# EAGLE board Girraffe V3.3 (EAGLE 7.7.0)
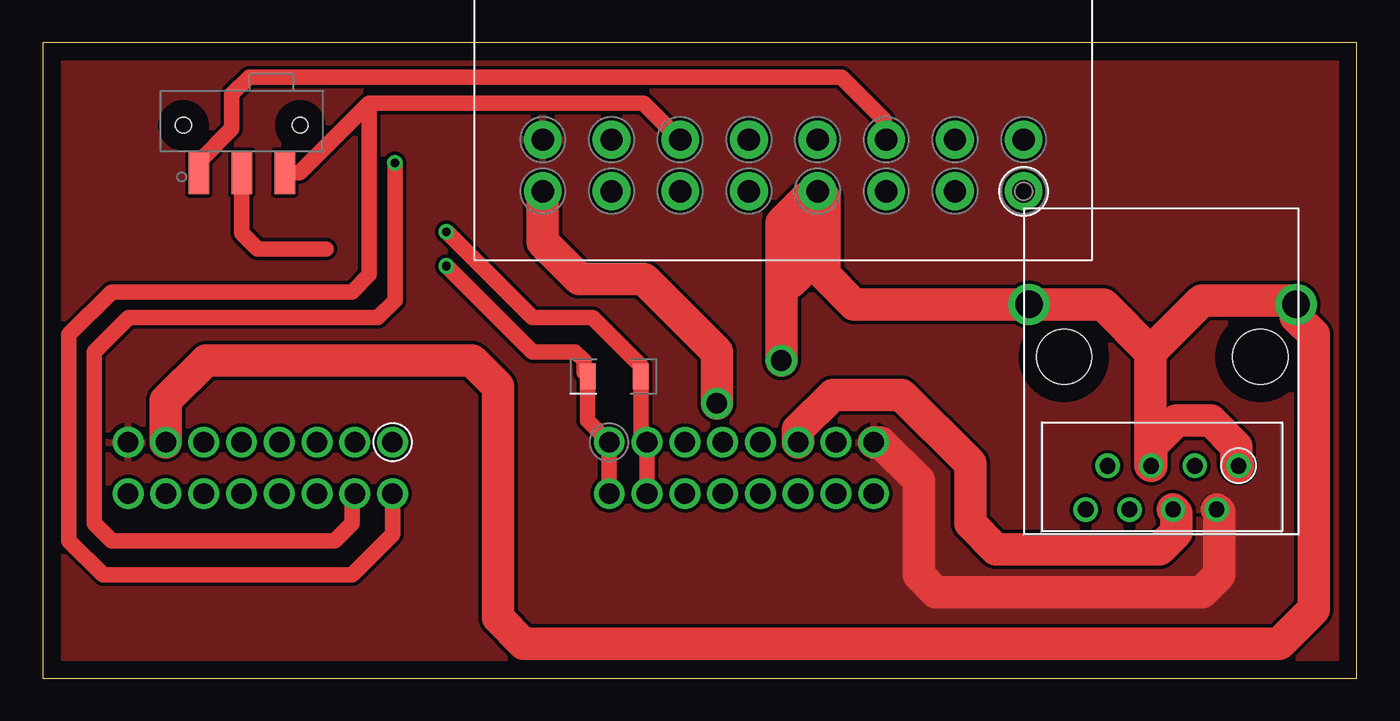
[diagram p0: board, top side]
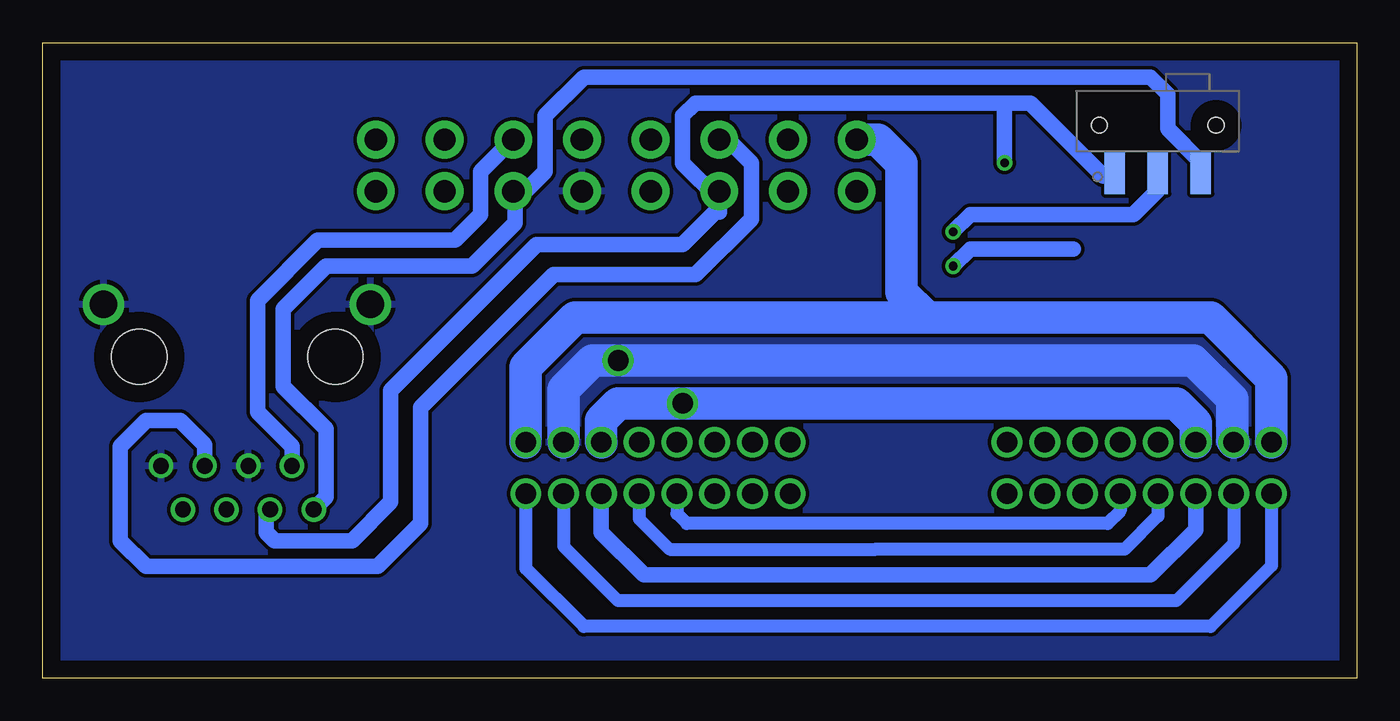
[diagram p1: board, bottom side, seen from below]

Size 76.5 x 37 mm. Coordinates in mm from the lower left corner, seen from the top.
Outline: 0,0 76.5,0 76.5,37 0,37 0,0
Copper layers (1*16): Top 0.035mm / dielectric 1.5mm / Bottom 0.035mm
Design rules "default *": minimum track width 10mil, minimum drill 24mil, track to track 8mil, track to pad 8mil, pad to pad 8mil, via to via 8mil, smd to smd 8mil, copper to edge 40mil, drill to drill 6mil, minimum pad ring 10mil, minimum via ring 8mil, stop-mask expansion 4mil, vias tented up to drill 0mil, thermal gap 10mil

## Footprints (pad centres in the part's own frame; a part is rotated, then mirrored left to right if it is on the bottom)
120OHM = smd 0.9 x 1.5: 1 0,0; 2 3.1,0
OBDII = drill 1.3 pad 2.2: 1 0,0; 2 0,-4; 3 0,-8; 4 0,-12; 5 0,-16; 6 0,-20; 7 0,-24; 8 0,-28; 9 -3,0; 10 -3,-4; 11 -3,-8; 12 -3,-12; 13 -3,-16; 14 -3,-20; 15 -3,-24; 16 -3,-28
R137 = drill 1.2: 1 0,0; 2 -2.2,0; 3 -4.4,0; 4 -6.6,0; 5 -8.8,0; 6 -11,0; 7 -13.2,0; 8 -15.4,0; 9 0,-3; 10 -2.2,-3; 11 -4.4,-3; 12 -6.6,-3; 13 -8.8,-3; 14 -11,-3; 15 -13.2,-3; 16 -15.4,-3
R137OUT = drill 1.2: 1 0,0; 2 2.2,0; 3 4.4,0; 4 6.6,0; 5 8.8,0; 6 11,0; 7 13.2,0; 8 15.4,0; 9 0,-3; 10 2.2,-3; 11 4.4,-3; 12 6.6,-3; 13 8.8,-3; 14 11,-3; 15 13.2,-3; 16 15.4,-3
SLIDESWITCH = smd 1.2 x 2.5: 1 -2.5,0; 2 0,0; 3 2.5,0 | hole 0.9: 3.4,2.75; -3.4,2.75
RJ45 = drill 0.914: 12V 2.54,-1.27; CAN1H 2.54,-6.35; CAN1L 0,-2.54; CAN2H 2.54,-8.89; CAN2L 0,-7.62; GND@1 0,0; GND@5 0,-5.08; IGN 2.54,-3.81 | drill 1.6: GND@9 -9.4,3.35; GND@10 -9.4,-12.195 | hole 3.2: -6.35,1.27; -6.35,-10.16

## Placement (x,y rotation side)
U$1  120OHM  [120OHM]  31.72,17.57 0 top
U$2  OBDII90DEG  [OBDII]  57.11,28.36 270 top
U$3  R137IN  [R137]  20.36,13.74 0 top
U$4  R137OUT  [R137OUT]  32.98,13.74 0 top
U$5  SLIDESWITCH  [SLIDESWITCH]  11.58,29.45 0 top
U$6  SLIDESWITCH  [SLIDESWITCH]  11.58,29.45 0 bottom
U$8  RJ45  [RJ45]  69.62,12.36 270 top

## Library data of the parts
U$1-U$6 U$8 = Giraffe

## Nets
12V: U$2.16 U$3.8 U$4.8 U$8.12V
ACC: U$2.8 U$3.6 U$4.6 U$8.IGN
GND: U$2.4 U$3.7 U$4.7 U$8.GND@1 U$8.GND@5 U$8.GND@9 U$8.GND@10
N$1: U$1.1 U$4.1 U$4.9 U$5.2
N$2: U$1.2 U$4.2 U$4.10 U$6.2
N$3: U$2.14 U$3.9 U$5.3 U$8.CAN1L
N$4: U$2.11 U$5.1 U$8.CAN2L
N$5: U$2.6 U$3.10 U$6.1 U$8.CAN1H
N$6: U$2.3 U$6.3 U$8.CAN2H
N$7: U$3.16 U$4.16
N$8: U$3.15 U$4.15
N$9: U$3.14 U$4.14
N$10: U$3.13 U$4.13
N$11: U$3.12 U$4.12

## Tracks (layer width: path | path; a pad name or v marks a point on that pad's centre or on a via)
12V
  Top 1.9: U$4.8 48.76,13.74 51,11.5 51,6 52,5 67.5,5 68.5,6 68.5,9.67 U$8.12V
  Bottom 1.9: U$3.8 4.96,17.46 8.5,21 25,21 | 25,21 45.5,21 48.38,18.12 U$4.8 | U$2.16 27.86,31.36 26.5,30 26.5,22.5 25,21
  pour Top: 1,36 75.5,36 75.5,33 75.5,1 1,1
ACC  (via drill 1.2)
  Top 1.9: 39.25,16.75 v39.25,16 39.25,19 35,23.25 31.25,23.25 29.11,25.39 U$2.8 | U$4.6 43.98,14.48 46,16.5 50,16.5 54,12.5 54,9 55.5,7.5 65,7.5 66,8.5 66,9.63 U$8.IGN
  Bottom 1.9: U$3.6 9.36,14.86 10.5,16 v39.25,16 43,16 44,15 44,13.76 U$4.6
GND  (via drill 1.2)
  Top 1.9: U$3.7 7.16,16.16 9.5,18.5 25,18.5 26.5,17 26.5,3.5 28,2 72,2 74,4 74,20 72.97,21.03 U$8.GND@9 72.73,22 67.5,22 64.5,19 | 64.5,19 61.74,21.76 U$8.GND@10 47.24,21.76 45.5,23.5 45.5,27.97 U$2.4 | 64.5,19 64.5,12.4 U$8.GND@5 64.54,13.54 66,15 68,15 69.5,13.5 69.5,12.48 U$8.GND@1 | v43,18.5 43,24 | 43,24 43,26.5 44.5,28 44.5,25.5 43,24 | 43,24 44.5,24 | 45,24 44.5,24 | 44.5,24 43.5,23
  Bottom 1.9: U$4.7 46.18,16.82 44.5,18.5 v43,18.5 9.5,18.5 7.25,16.25 7.25,13.83 U$3.7
  pour Bottom: 0.5,36.5 75.5,36.5 75.5,0.5 0.5,0.5
N$1  (via drill 0.5)  (1 unrouted)
  Top 0.9: U$4.9 U$4.1 31.72,15 U$1.1 31.5,17.79 31.5,18.5 31,19 28.5,19 v23.5,24 | U$5.2 11.58,25.92 12.5,25 16.5,25
  Bottom 0.9: 16.5,25 22.5,25 v23.5,24
N$2  (via drill 0.5)
  Top 0.9: U$4.10 U$4.2 34.82,14.1 U$1.2 34.82,18.18 32,21 28.5,21 v23.5,26
  Bottom 0.9: U$6.2 11.58,28.42 13,27 22.5,27 v23.5,26
N$3
  Top 0.9: U$5.3 14.95,29.45 19,33.5 | 19,33.5 34.97,33.5 U$2.14 | U$3.9 20.36,8.36 18,6 3.5,6 1.5,8 1.5,20 4,22.5 18,22.5 19,23.5 19,33.5
  Bottom 0.9: U$2.14 36.61,31.36 35.25,30 35.25,26.75 38.5,23.5 46.75,23.5 54.5,15.75 54.5,9 57,6.5 70.5,6.5 72,8 72,13.5 70.5,15 68.5,15 67.08,13.58 U$8.CAN1L
N$4
  Top 0.9: U$2.11 49,31.47 49,32.5 46.5,35 12,35 11,34 11,32 9,30 9,29.53 U$5.1
  Bottom 0.9: U$2.11 49.14,31.36 51,29.5 51,27 52.5,25.5 60.5,25.5 64,22 64,15.5 62,13.5 U$8.CAN2L
N$5  (via drill 0.5)
  Top 0.9: 18,10.5 18,10.58 U$3.10 | v20.5,30 20.5,22 19.5,21 5,21 3,19 3,9 4,8 17,8 18,9 18,10.5 | 18.5,11 18,10.5
  Bottom 0.9: U$2.6 37.11,27.86 | 37.11,27.86 37.11,27.14 37.36,27.14 39.25,25.25 47.75,25.25 56.25,16.75 56.25,10.25 58.5,8 63,8 63.5,8.5 63.5,9.59 U$8.CAN1H | 37.11,27.86 39.25,30 39.25,32.75 38.5,33.5 20.5,33.5 | U$6.1 14.28,29.25 14.75,29.25 19,33.5 20.5,33.5 | 20.5,33.5 v20.5,30
N$6
  Bottom 0.9: 49,28.25 48.5,28.25 47.25,29.5 47.25,32.75 45,35 12,35 11,34 11,32 9,30 9,29.53 U$6.3 | 49,28.25 U$2.3 | 49,28.25 49,26.5 51.5,24 60,24 62.5,21.5 62.5,17 60,14.5 60,10.55 U$8.CAN2H
N$7
  Bottom 0.75: U$3.16 4.96,6.54 8.5,3 45,3 48.38,6.38 U$4.16
N$8
  Bottom 0.75: U$3.15 7.16,7.84 10.5,4.5 43,4.5 46.18,7.68 U$4.15
N$9
  Bottom 0.75: U$4.14 43.98,8.48 41.5,6
  Bottom 0.9: U$3.14 9.36,8.64 12,6 41.5,6 44,8.5 44,10.5
N$10
  Bottom 0.75: U$3.13 11.56,9.44 13.5,7.5 27,7.5 28,7.5 40,7.5 41.78,9.28 U$4.13
N$11
  Bottom 0.75: U$3.12 13.76,9.74 14.5,9 39,9 39.58,9.58 U$4.12

## Text on the board
tDocu: For Team #Subaru | Brandon S. | http://dattechweb.com | Eyesight | Input
bDocu: B:92918.3.2-GEM